# Altium PCB PCB_Audio Output_Single_Layer.pcbdoc
Units mil, origin at the board's own origin, x right, y up, seen from the top; angles counter-clockwise.
Board outline 3575 x 3660 mil, 2 copper layers (Top Layer, Bottom Layer); 22 components, 13 nets, 84 pads, 0 vias.
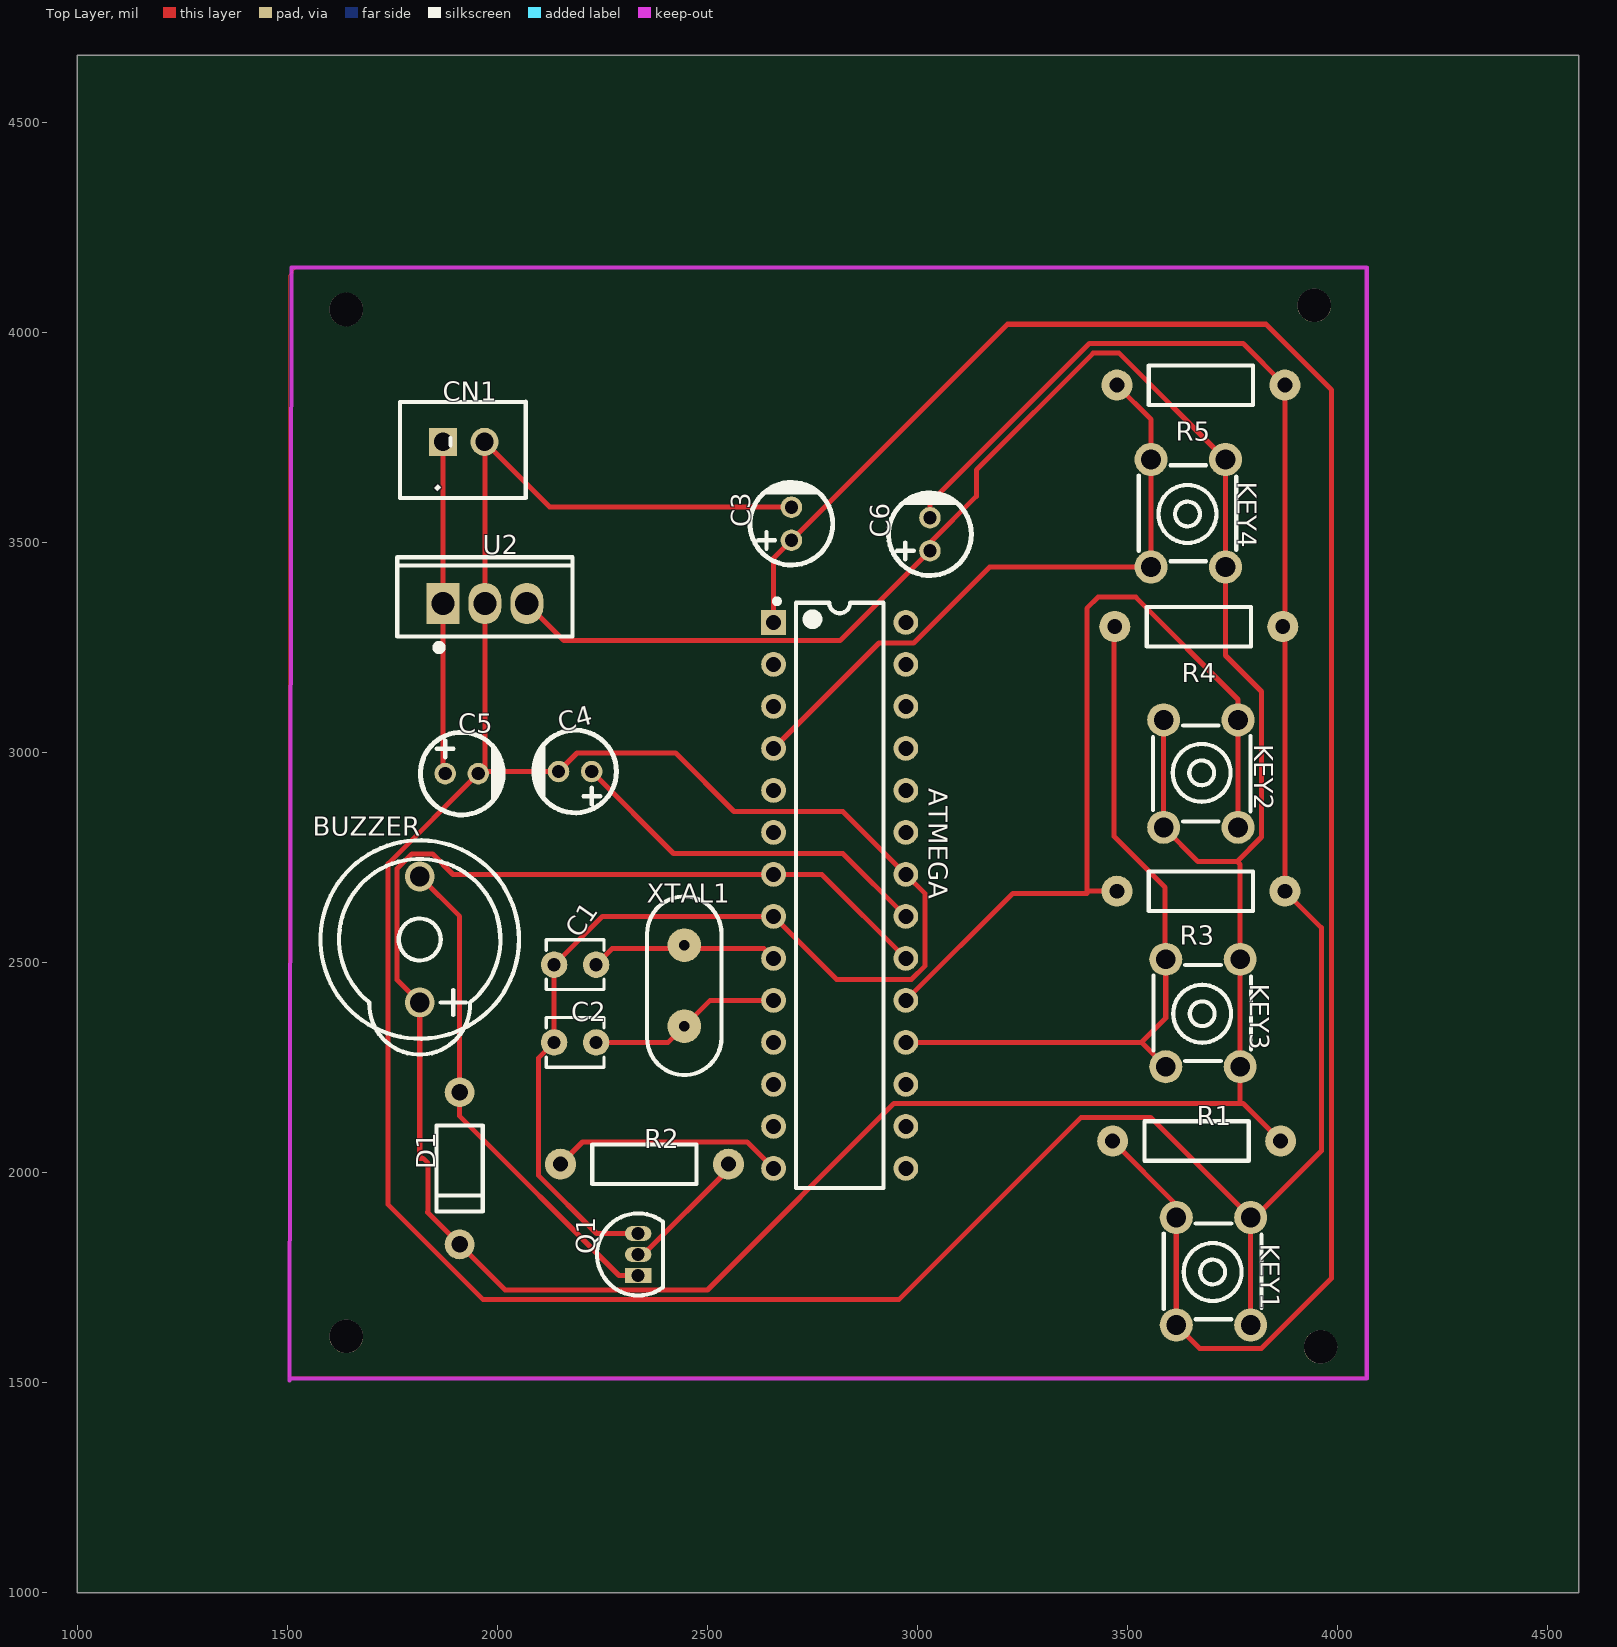
[diagram p0: Top Layer view]
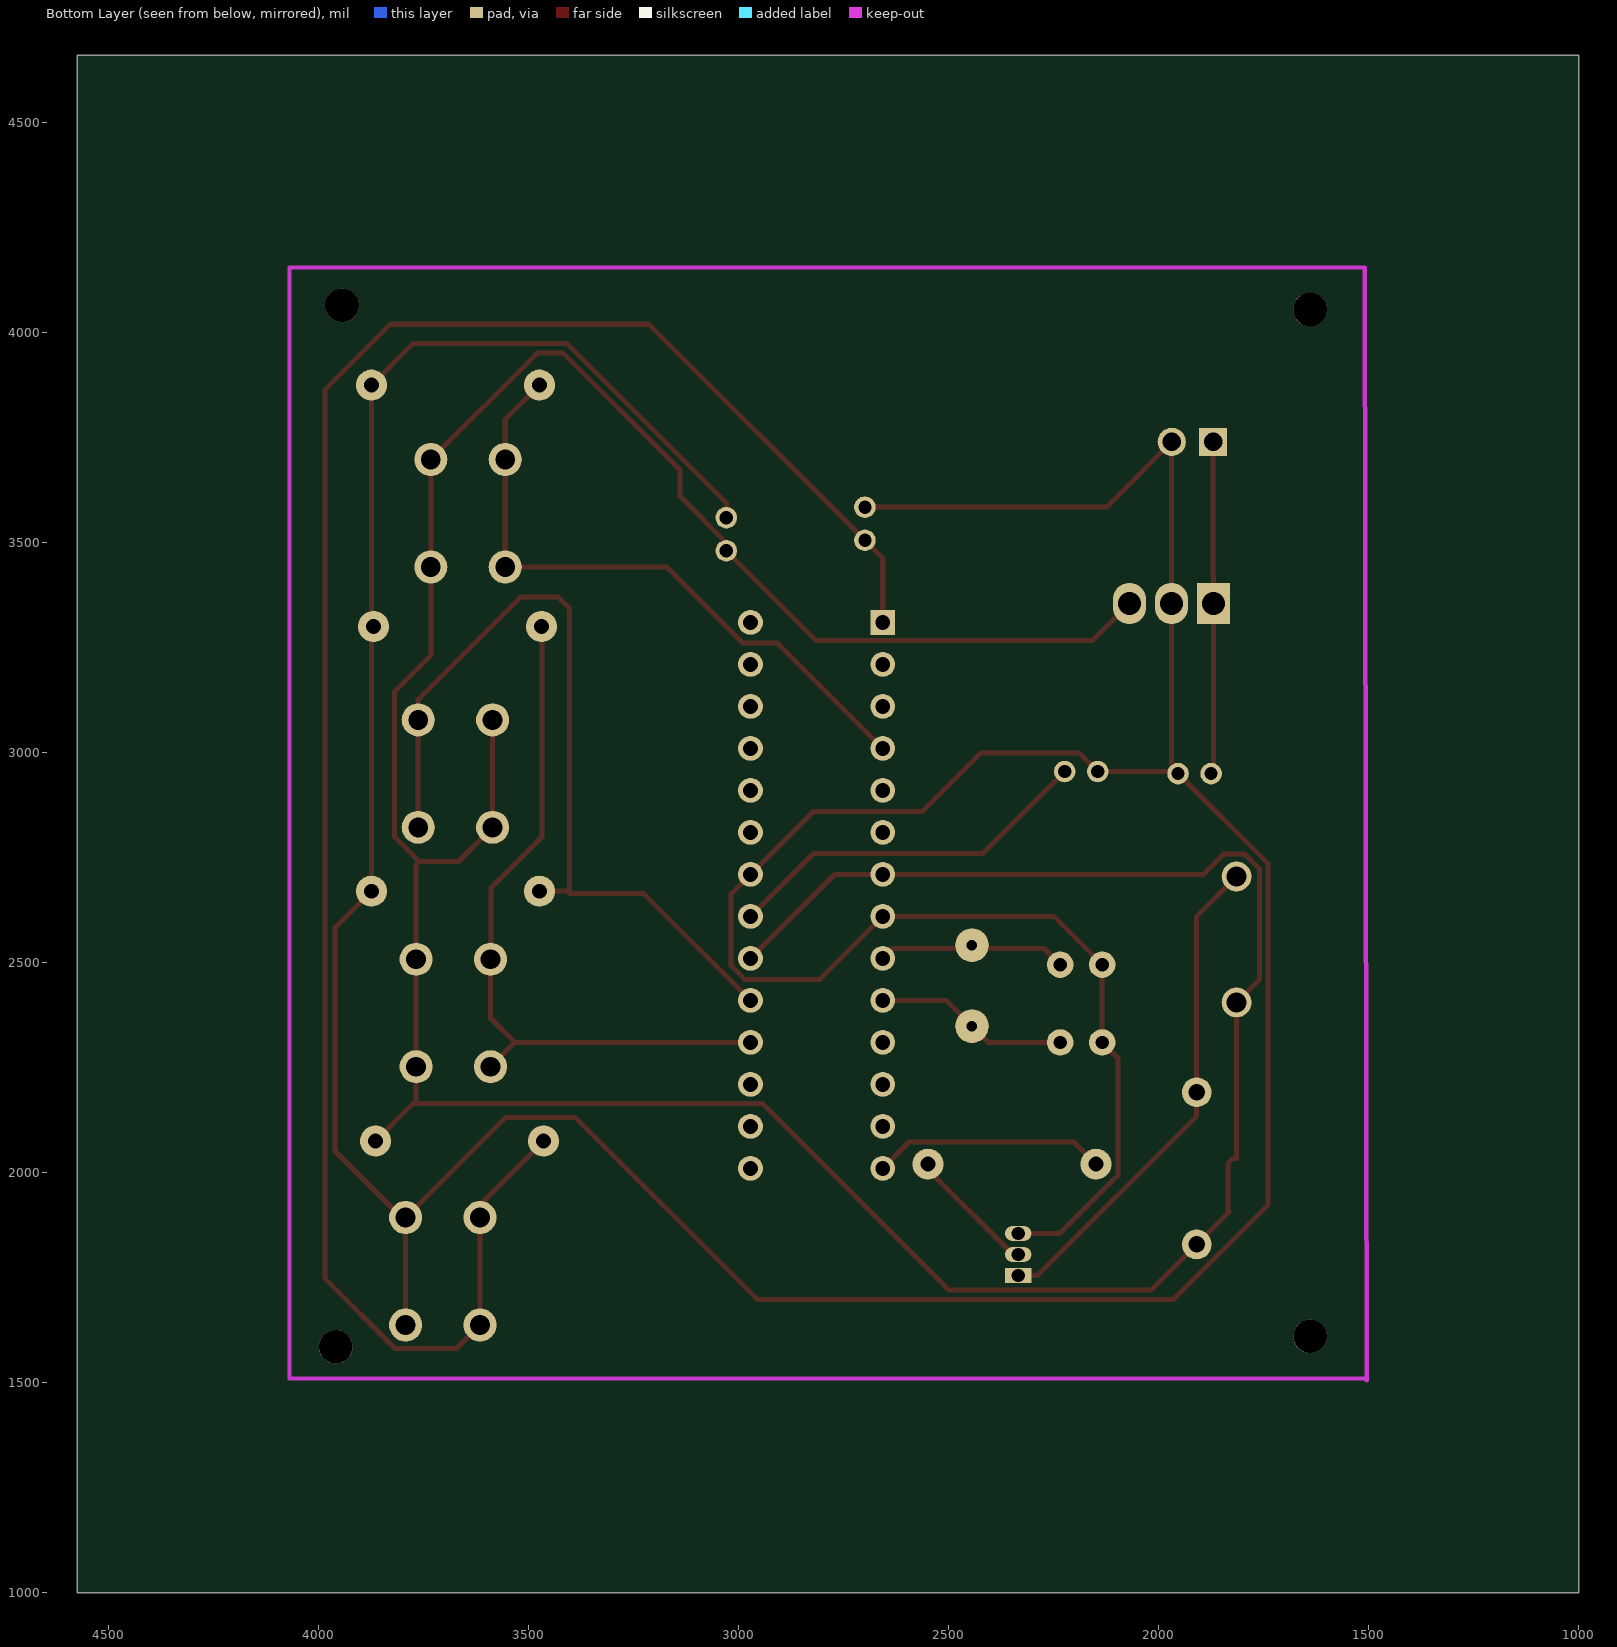
[diagram p1: Bottom Layer view, seen from below]

## Layer stack, top to bottom
Top Layer: signal copper (thickness not stored)
Dielectric: dielectric 12.6, FR-4, Dk 4.8
Bottom Layer: signal copper (thickness not stored)

## Board outline
4575,1000 1000,1000 1000,4660 4575,4660

## Components (designator, comment, footprint, x,y, rotation, side; value= is the part's Value field where it differs from the comment)
ATMEGA "ATMEGA _328P-PU" DIP-28_L34.6-W7.3-P2.54-LS10.2-BL 2815,2660 r270 top
BUZZER "5V_BUZZER" DIP-BUZZER-12X6 1815,2555 r180 top
C1 "22pF" CAP-TH_L3.5-W3.0-P2.54-D0.8 2185,2495 r0 top
C2 "22pF" CAP-TH_L3.5-W3.0-P2.54-D0.8 2185,2310 r0 top
C3 "100nF" CAP-TH_BD5.0-P2.00-D0.8-FD 2700,3545 r90 top
C4 "100nF" CAP-TH_BD5.0-P2.00-D0.8-FD 2185,2955 r180 top
C5 "330nF" CAP-TH_BD5.0-P2.00-D0.8-FD 1915,2950 r0 top
C6 "100nF" CAP-TH_BD5.0-P2.00-D0.8-FD 3030,3520 r90 top
CN1 "JST_2 PIN" CONN-TH_XHB-2A 1920,3740 r180 top
D1 "1N4001_Diode" DO-41_BD2.4-L4.7-P8.70-D0.9-RD 1910,2010 r90 top
KEY1 "Reset_Button" KEY-TH_4P-L6.0-W6.0-P4.50 3705,1765 r90 top
KEY2 "PLAY" KEY-TH_4P-L6.0-W6.0-P4.50 3675,2950 r270 top
KEY3 "CHANGE SONG" KEY-TH_4P-L6.0-W6.0-P4.50 3680,2380 r90 top
KEY4 "STOP" KEY-TH_4P-L6.0-W6.0-P4.50 3645,3570 r90 top
Q1 "BC547B_NPN_Transistor" TO-92-3_L4.9-W3.7-P1.27-L 2335,1805 r90 top
R1 "10K" AXIAL-0.4 3665,2075 r0 top
R2 "220Ω" AXIAL-0.4 2350,2020 r0 top
R3 "330Ω" AXIAL-0.4 3675,2670 r180 top
R4 "330Ω" AXIAL-0.4 3670,3300 r180 top
R5 "330Ω" AXIAL-0.4 3675,3875 r180 top
U2 "7805_Regulator" TO-220-3_L10.0-W4.5-P2.54-L 1970,3355 r0 top
XTAL1 "16MHz" "16MHZ_OSC [PCB]" 2445,2445 r0 top

## Footprints (in the part's own frame and the unit in brackets; to place one, negate y for a bottom-side part, rotate by r counter-clockwise, add the part's x,y. Pads: shape width x height; smd on the part's side, far side on the other; paste and mask are expansions set on the pad)
"16MHZ_OSC [PCB]" [mil]
  round 80 hole 25: 1(0,96.46) 2(0,-96.46)
  silkscreen extent -88,-212 88,212
AXIAL-0.4 [mil]
  round 74 hole 35.4: 1(-200,0) 2(200,0)
  silkscreen extent -124,-47 124,47
CAP-TH_BD5.0-P2.00-D0.8-FD [mm]
  round 1.3 hole 0.8: 1(-1,0) 2(1,0)
  silkscreen extent -2.5,-2.5 2.5,2.5
CAP-TH_L3.5-W3.0-P2.54-D0.8 [mm]
  round 1.6 hole 0.8: 1(-1.27,0) 2(1.27,0)
  silkscreen extent -1.75,-1.5 1.75,1.5
CONN-TH_XHB-2A [mm]
  rect 1.7x1.7 hole 1.1: 1(1.251,0)
  round 1.7 hole 1.1: 2(-1.251,0)
  silkscreen extent -3.75,-2.42 3.86,3.4
DIP-28_L34.6-W7.3-P2.54-LS10.2-BL [mm]
  rect 1.5x1.5 hole 0.9: 1(-16.51,-4)
  round 1.5 hole 0.9: 2(-13.97,-4) 3(-11.43,-4) 4(-8.89,-4) 5(-6.35,-4) 6(-3.81,-4) 7(-1.27,-4) 8(1.27,-4) 9(3.81,-4) 10(6.35,-4) 11(8.89,-4) 12(11.43,-4) 13(13.97,-4) 14(16.51,-4) 15(16.51,4) 16(13.97,4) 17(11.43,4) 18(8.89,4) 19(6.35,4) 20(3.81,4) 21(1.27,4) 22(-1.27,4) 23(-3.81,4) 24(-6.35,4) 25(-8.89,4) 26(-11.43,4) 27(-13.97,4) 28(-16.51,4)
  silkscreen extent -17.94,-3.95 17.7,2.65
DIP-BUZZER-12X6 [mm]
  round 1.8 hole 1.2: 1(0,3.81) 2(0,-3.81)
  silkscreen extent -6,-6 6,6.96
DO-41_BD2.4-L4.7-P8.70-D0.9-RD [mm]
  round 1.8 hole 1: 1(-4.6,0) 2(4.6,0)
  silkscreen extent -2.6,-1.4 2.6,1.4
KEY-TH_4P-L6.0-W6.0-P4.50 [mm]
  round 2 hole 1.2: 1(-3.25,-2.25) 2(3.25,-2.25) 3(3.25,2.25) 4(-3.25,2.25)
  silkscreen extent -2.9,-2.9 2.9,3
TO-92-3_L4.9-W3.7-P1.27-L [mm]
  rect 0.9x1.6 hole 0.8: 1(-1.27,0)
  oval 0.9x1.6 hole 0.8: 2(0,0) 3(1.27,0)
  silkscreen extent -2.48,-1.5 2.48,2.48
TO-220-3_L10.0-W4.5-P2.54-L [mm]
  rect 2x2.5 hole 1.4: 1(-2.54,0)
  oval 2x2.5 hole 1.4: 2(0,0) 3(2.54,0)
  silkscreen extent -5.3,-2.86 5.3,2.8

## Free pads (board coordinates)
  round 80 hole 80 unplated: ""(1640,1610) ""(1640,4055) ""(3945,4065) ""(3960,1585)

## Nets (pads, with @x,y where several pads share a name; then routed paths per layer and width w, separated by ;. In a path a pad name is that pad's centre, name@x,y a point inside that pad or via, vN(x,y) a via of type N, cw(c..) or ccw(c..) an arc to the next point about the centre after c; other vN are vias at no path point)
5V: ATMEGA.7 ATMEGA.20 BUZZER.1 C6.1 D1.1 KEY2.1 KEY2.2 KEY3.1 KEY3.2 KEY4.1 KEY4.2 R1.2 U2.3 | length 8710
  Top Layer w12: U2.3 2158.6,3266.4 2815.77,3266.4 C6.1 3030,3500 3140.4,3610.4 3140.4,3673 3418.6,3951.2 3480.3,3951.2 3733.6,3697.9 KEY4.1 3733.6,3231.3 3819.6,3145.3 3819.6,2799 3761.3,2740.7 ; ATMEGA.20 2772.5,2710 ATMEGA.7 1894.4,2710 1845.7,2758.7 1796.3,2758.7 1760.9,2723.4 1760.9,2459.1 BUZZER.1 1815,2033.8 1823.3,2033.8 1835.1,2022 1835.1,1907.2 1833.4,1905.5 D1.1 2018.3,1720.6 2500,1720.6 2944.2,2164.8 3768.6,2164.8 ; KEY2.1@3586.4,3077.9 KEY2.2 3667.8,2740.7 3761.3,2740.7 ; R1.2 3775.2,2164.8 3768.6,2164.8 ; 3761.3,2740.7 3768.6,2733.4 3768.6,2507.9 KEY3.1 3768.6,2164.8
BUZZER: ATMEGA.14 R2.1 | length 555.3
  Top Layer w12: R2.1 2202.7,2072.7 2594.8,2072.7 ATMEGA.14
BUZZER1_2: BUZZER.2 D1.2 Q1.1 | length 1192.1
  Top Layer w12: BUZZER.2 1910,2610 D1.2 1910,2134.4 2289.4,1755 Q1.1
CHANGE: ATMEGA.18 KEY3.3 KEY3.4 R4.2 | length 1707.2
  Top Layer w12: ATMEGA.18 3533.5,2310 ; R4.2@3468.6,3302.1 3468.6,2800.4 3590,2679 KEY3.3@3590,2510 ; KEY3.4 3533.5,2310 ; KEY3.3@3591.4,2507.9 3591.4,2367.9 3533.5,2310
GND: ATMEGA.8 ATMEGA.22 C1.1 C2.1 C3.2 C4.2 C5.2 C6.2 CN1.2 KEY1.1 KEY1.2 Q1.3 R3.1 R4.1 R5.1 U2.2 | length 11766.8
  Top Layer w12: Q1.3 2235.8,1855 2097.5,1993.3 2097.5,2272.5 C2.1 C1.1 2250,2610 ATMEGA.8 2807.5,2460 2986.2,2460 3018.5,2492.3 3018.5,2664 ATMEGA.22 2822.5,2860 2563.3,2860 2424.3,2999 2189.6,2999 C4.2 C5.2@1970,2955 ; C3.2@2700,3585 2124.3,3585 1969.3,3740 1970,3739.2 1970,3584.4 U2.2 C5.2@1970,2955 ; C6.2 3030,3594.7 3409.8,3974.5 3775.5,3974.5 R5.1 3875,3305 R4.1 3875,3295 R3.1 3961.7,2583.3 3961.7,2051.4 3803.3,1892.9 KEY1.2@3793.6,1892.9 ; KEY1.1 KEY1.2@3793.6,1892.9 ; C5.2@1970,2955 1965,2950 C5.2 1739.8,2735.4 1739.8,1923.5 1965.3,1698.1 2956.5,1698.1 3390.1,2131.6 3554.9,2131.6 KEY1.2@3793.6,1892.9
PLAY: ATMEGA.19 KEY2.3 KEY2.4 R3.2 | length 2065
  Top Layer w12: ATMEGA.19 3227.5,2665 3403.6,2665 ; R3.2 3408.6,2670 3403.6,2665 ; KEY2.3 3763.6,3077.9 3763.6,3126.4 3520,3370 3430,3370 3403.6,3343.6 3403.6,2665
Q1_2: Q1.2 R2.2 | length 311.4
  Top Layer w12: Q1.2 2347.5,1805 2550,2007.5 R2.2
STOP: ATMEGA.4 KEY4.3 KEY4.4 R5.2 | length 1544.5
  Top Layer w12: ATMEGA.4 2908.5,3261 2991,3261 3172.1,3442 KEY4.4 3556.4,3697.9 3556.4,3793.6 R5.2
U1_1: ATMEGA.1 C3.1 KEY1.3 KEY1.4 R1.1 | length 4855.3
  Top Layer w12: ATMEGA.1 2657.5,3463.1 C3.1 3214.4,4020 3830,4020 3986.1,3863.9 3986.1,1748.4 3818.8,1581.2 3672.3,1581.2 KEY1.4 3616.4,1892.9 3616.4,1923.6 R1.1
U1_9: ATMEGA.9 C1.2 XTAL1.1 | length 456.2
  Top Layer w12: C1.2 2273.4,2533.3 XTAL1.1@2445,2533.3 ; XTAL1.1 XTAL1.1@2445,2533.3 ; ATMEGA.9 2634.2,2533.3 XTAL1.1@2445,2533.3
U1_10: ATMEGA.10 C2.2 XTAL1.2 | length 463.9
  Top Layer w12: C2.2 2406.5,2310 XTAL1.2 2506.5,2410 ATMEGA.10
U1_21: ATMEGA.21 C4.1 | length 891
  Top Layer w12: C4.1 2419.4,2760 2822.5,2760 ATMEGA.21
VCC: C5.1 CN1.1 U2.1 | length 792.7
  Top Layer w12: CN1.1 1870.8,3419.1 1870,3418.3 U2.1 1870,2955.6 C5.1
pads on no net: ATMEGA.2 ATMEGA.3 ATMEGA.5 ATMEGA.6 ATMEGA.11 ATMEGA.12 ATMEGA.13 ATMEGA.15 ATMEGA.16 ATMEGA.17 ATMEGA.23 ATMEGA.24 ATMEGA.25 ATMEGA.26 ATMEGA.27 ATMEGA.28

## Polygon pours and split planes (outlines as drawn)
GND on Top Layer (solid): 1508.6,4142.1 1523.6,4157.1 4068.6,4157.1 4068.6,1512.1 1503.6,1512.1 1503.6,4137.1 1508.6,4142.1 1513.6,4142.1